# Altium PCB controller_V1.0.PcbDoc (part 8 of 8)
Units mm, origin at the board's own origin, x right, y up, seen from the top; angles counter-clockwise.
Board outline 284.13 x 175.13 mm, 4 copper layers (Top Layer, GND, VCC, Bottom Layer); 496 components, 415 nets, 1682 pads, 750 vias.
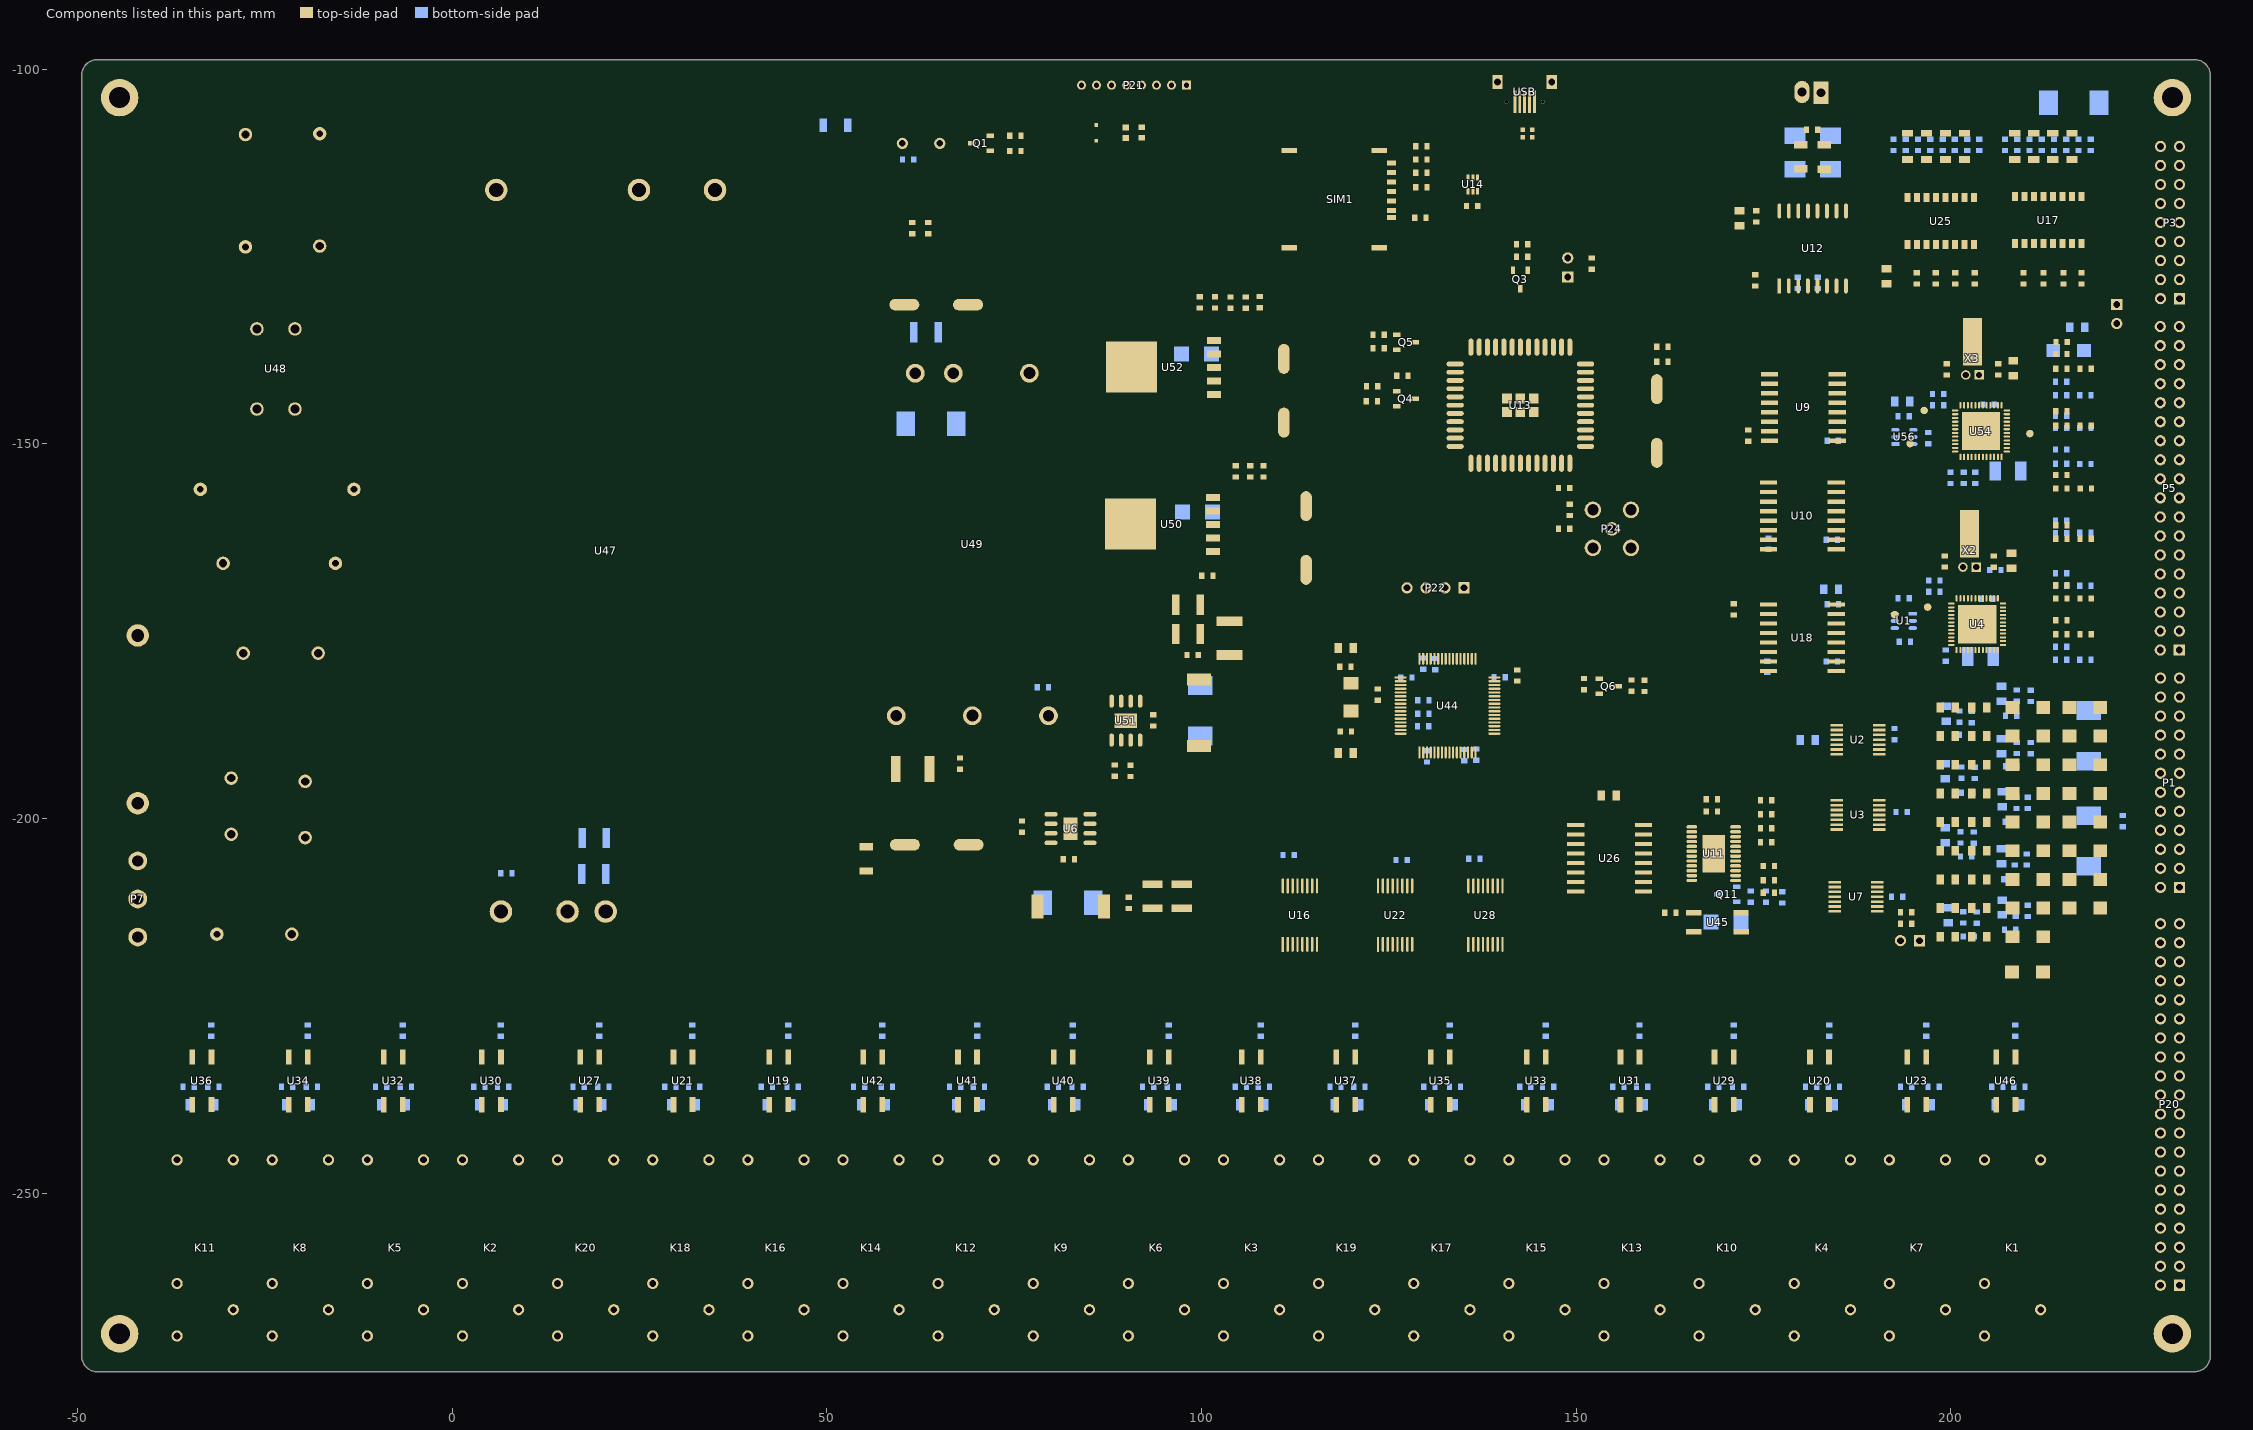
[diagram p10: the components of this part, seen from the top]

## Other copper
Top Layer:
  rectangle net 3.3V_ISO: 113.868,-192.062 118.847,-190.094
  rectangle net 3.3V_ISO: 104.419,-140.691 112.141,-134.772
  rectangle net VCC_5V_ISO: 150.292,-198.171 153.924,-195.936
  rectangle net 5VD_F: 154.737,-197.79 158.674,-196.126
  rectangle net NetF4_1: 55.75,-195.682 60.703,-184.76
  rectangle net VCC_5V_ISO: 89.151,-213.97 99.057,-211.43
  rectangle net VCC_5V_ISO: 86.103,-213.97 89.151,-210.033
  rectangle net NetC139_1: 91.564,-190.602 96.898,-188.697
  rectangle net NetC139_1: 95.501,-191.872 101.597,-188.697
  rectangle net NetC143_1: 97.787,-182.093 105.534,-180.061
  rectangle net NetC143_1: 99.184,-182.093 105.534,-177.394
  rectangle net NetC143_1: 99.184,-177.775 100.962,-169.975
  rectangle net VBAT: 150.038,-142.951 154.153,-141.173
  rectangle net VBAT: 153.899,-143.713 161.087,-140.386
  rectangle net VBAT: 158.496,-144.704 161.265,-136.449
  rectangle net VBAT: 159.461,-144.704 161.798,-140.462
  rectangle net GND: 87.681,-188.062 92.413,-185.979
  rectangle net AGND: 81.184,-203.556 83.936,-198.044
  pour cut-out: 148.082,-154.102 148.031,-154.153 148.031,-163.271 155.245,-163.271 156.464,-162.052 156.464,-160.401 156.108,-160.045 156.105,-160.049 150.676,-160.049 150.266,-159.639 150.266,-154.229 150.139,-154.102
  region net 24V_IN: 58.417,-130.404 62.608,-130.404 62.862,-130.658 62.862,-137.77 63.243,-138.151 63.243,-141.453 62.608,-142.088 60.449,-142.088 57.909,-139.548 57.909,-130.912
  region net 24V_F: 62.608,-196.19 66.545,-200.127 66.545,-204.064 67.053,-204.572 70.99,-204.572 73.022,-202.54 80.515,-202.54 80.896,-202.159 80.896,-201.778 80.515,-201.397 71.857,-201.397 65.148,-194.688 65.148,-191.364 64.767,-190.983 62.862,-190.983 62.608,-191.237
  region net NetC137_1: 78.737,-202.921 76.451,-205.207 76.451,-213.208 76.705,-213.462 79.118,-213.462 79.372,-213.208 79.372,-205.08 80.896,-203.556 80.896,-203.048 80.769,-202.921
  pour cut-out: 56.566,-205.207 57.76,-206.4 57.76,-215.875 53.111,-220.523 52.248,-220.523 50.749,-219.024 50.749,-208.178 53.721,-205.207
VCC:
  rectangle net 3.3V_ISO: 111.811,-206.172 119.939,-187.604
Bottom Layer:
  rectangle net 3.3V_ISO_AD: 210.978,-138.548 214.757,-136.373
  rectangle net NetD72_1: 217.094,-138.379 218.897,-133.617
  rectangle net 5VA: 194.056,-145.39 196.545,-143.51
  rectangle net 24V_IN: 59.179,-149.073 63.243,-133.452
  rectangle net NetC137_1: 76.324,-213.462 80.134,-208.636
  rectangle net NetC139_1: 98.168,-191.872 101.597,-187.681
  rectangle net NetC139_1: 95.501,-191.872 101.597,-190.729
  region net 24V_IN: 19.936,-201.016 19.936,-209.779 18.793,-210.922 18.793,-213.589 19.555,-214.351 22.095,-214.351 23.365,-213.081 23.365,-201.397 22.984,-201.016

## Silkscreen, mask and mechanical layers (free items; w line width, h text height)
Top Overlay:
  text "485_B" at 175.412,-99.847 h1.02 r270
  text "485_A" at 186.588,-100.178 h1.02 r270
  text "SWDIO" at 132.08,-162.382 h1.02 r270
  text "SWCLK" at 126.721,-162.408 h1.02 r270
  text "3.3V" at 134.874,-163.322 h1.02 r270
  text "GND" at 129.337,-164.313 h1.02 r270
  text "AC_L" at -35.154,-208.737 h1.52
  text "AC_N" at -35.382,-210.947 h1.52
  text "EARTH" at -36.982,-221.412 h1.52
Bottom Overlay:
  text "LCD_RX" at 89.991,-104.546 h1.02 r90
  text "5V" at 86.563,-104.623 h1.02 r90
  text "LCD_TX" at 92.456,-104.648 h1.02 r90
  text "GND" at 98.552,-104.724 h1.02 r90
  text "24V" at 234.236,-110.82 h1.02
  text "24V" at 225.552,-110.846 h1.02
  text "DI4" at 225.4,-113.132 h1.02
  text "G" at 232.613,-113.284 h1.02
  text "DI5" at 225.501,-115.595 h1.02
  text "G" at 232.715,-115.722 h1.02
  text "DI6" at 225.425,-118.313 h1.02
  text "G" at 232.867,-118.313 h1.02
  text "DI7" at 225.806,-120.828 h1.02
  text "G" at 232.893,-120.98 h1.02
  text "DI0" at 225.933,-123.19 h1.02
  text "G" at 232.893,-123.444 h1.02
  text "DI1" at 225.831,-125.806 h1.02
  text "G" at 232.918,-125.933 h1.02
  text "DI2" at 225.831,-128.194 h1.02
  text "G" at 232.969,-128.448 h1.02
  text "DI3" at 225.806,-130.429 h1.02
  text "G" at 233.045,-131.089 h1.02
  text "PB8" at 226.949,-136.881 h1.02
  text "PB1" at 234.21,-137.414 h1.02
  text "PB1" at 234.21,-139.852 h1.02
  text "PB8" at 226.974,-140.005 h1.02
  text "PB9" at 226.771,-144.932 h1.02
  text "PB2" at 234.21,-145.085 h1.02
  text "PB9" at 226.822,-147.168 h1.02
  text "PB2" at 234.21,-147.523 h1.02
  text "PB10" at 232.918,-151.714 h1.02 r90
  text "PB3" at 226.924,-152.806 h1.02
  text "PB3" at 227,-155.143 h1.02
  text "PB11" at 226.822,-160.172 h1.02
  text "PB4" at 234.21,-160.299 h1.02
  text "PB4" at 234.21,-162.89 h1.02
  text "PB11" at 226.898,-163.195 h1.02
  text "PB12" at 226.924,-167.665 h1.02
  text "PB5" at 234.21,-167.894 h1.02
  text "PB5" at 234.21,-170.383 h1.02
  text "PB12" at 227.025,-170.917 h1.02
  text "PB13" at 226.797,-175.489 h1.02
  text "PB6" at 234.21,-175.59 h1.02
  text "PB13" at 226.797,-177.876 h1.02
  text "PB6" at 234.21,-178.105 h1.02
  text "AI0" at 226.39,-181.585 h1.02
  text "24V" at 234.226,-181.864 h1.02
  text "AI1" at 226.365,-184.125 h1.02
  text "24V" at 234.226,-184.379 h1.02
  text "AI2" at 226.416,-186.715 h1.02
  text "24V" at 234.226,-186.919 h1.02
  text "24V" at 234.226,-189.433 h1.02
  text "AI3" at 226.416,-189.459 h1.02
  text "AI4" at 226.314,-191.745 h1.02
  text "24V" at 234.226,-191.999 h1.02
  text "AI5" at 226.238,-194.361 h1.02
  text "24V" at 234.226,-194.462 h1.02
  text "AI6" at 226.263,-196.85 h1.02
  text "24V" at 234.226,-197.18 h1.02
  text "AI7" at 226.314,-199.542 h1.02
  text "24V" at 234.226,-199.593 h1.02
  text "AI8" at 226.974,-202.032 h1.02
  text "24V" at 234.226,-202.159 h1.02
  text "G" at 232.74,-204.622 h1.02
  text "G" at 232.715,-206.959 h1.02
  text "AO" at 226.797,-207.112 h1.02
  text "G" at 232.918,-209.652 h1.02
  text "24V" at 226.771,-209.753 h1.02
  text "R20" at 226.924,-214.427 h1.02
  text "R19" at 234.226,-217.195 h1.02
  text "R18" at 234.226,-219.735 h1.02
  text "R17" at 234.226,-222.377 h1.02
  text "R16" at 233.985,-224.765 h1.02
  text "R15" at 234.226,-227.33 h1.02
  text "R14" at 234.226,-229.87 h1.02
  text "R13" at 234.226,-232.359 h1.02
  text "R12" at 233.985,-234.874 h1.02
  text "R11" at 233.731,-237.439 h1.02
  text "R10" at 234.226,-240.081 h1.02
  text "R9" at 233.324,-242.621 h1.02
  text "R8" at 233.426,-245.085 h1.02
  text "R7" at 233.426,-247.599 h1.02
  text "R6" at 233.502,-250.215 h1.02
  text "R5" at 233.35,-252.73 h1.02
  text "R4" at 233.299,-255.27 h1.02
  text "R3" at 233.324,-257.81 h1.02
  text "R2" at 233.35,-260.325 h1.02
  text "R1" at 233.147,-262.839 h1.02
Mechanical 1:
  lines w0.127: -49.406,-100.781 cw(c-47.406,-100.781) -47.406,-98.781 ; -49.406,-100.762 -49.406,-271.781 ccw(c-47.406,-271.781) -47.406,-273.781 ; -47.634,-273.781 232.594,-273.781 ccw(c232.594,-271.781) 234.594,-271.781 234.594,-100.686 ; -47.424,-98.781 232.689,-98.781 ; 22.733,-110.465 40.869,-110.465 40.869,-127.864 ; 22.784,-110.465 18.821,-110.465 18.821,-117.653 20.752,-117.653 20.752,-112.395 21.895,-112.395 38.837,-112.395 38.837,-127.864 19.939,-127.864 19.939,-129.769 40.869,-129.769 40.869,-127.076 ; 215.748,-219.939 223.495,-212.192 224.742,-210.944 225.476,-210.944 ; 215.752,-219.934 ccw(c216.12,-220.383) 215.671,-220.751 215.952,-221.031 ; 215.91,-220.986 ccw(c216.359,-220.618) 216.728,-221.067 217.412,-220.383 225.4,-212.395 231.013,-212.395 231.394,-212.395 ; 225.222,-210.944 233.172,-210.944 233.172,-212.75 233.172,-214.935 ; 231.369,-212.395 cw(c231.407,-212.941) 231.953,-212.903 231.953,-214.96 ccw(c232.499,-214.922) 232.537,-215.468 232.664,-215.468 ; 232.594,-98.781 cw(c232.594,-100.781) 234.594,-100.781 ; 233.172,-214.884 cw(c232.626,-214.922) 232.664,-215.468 ; 232.664,-215.468 232.664,-215.468 ; -46.05,-213.512 -46.05,-206.146 -46.05,-195.885 -46.05,-193.548 -38.938,-193.548 -38.938,-195.072 -44.78,-195.072 -44.78,-213.512 -46.05,-213.512

## Dimensions
-47.634,-273.781 to -47.424,-98.781 on Keep-Out Layer
-49.406,-271.781 to 234.594,-271.781 on Keep-Out Layer

## Text inside footprints (layer, text, board x,y; h text height)
LS1: Top Overlay "+" at 59.713,-108.077 h0.76 r270